# EAGLE board prototype_board (EAGLE 6.3)
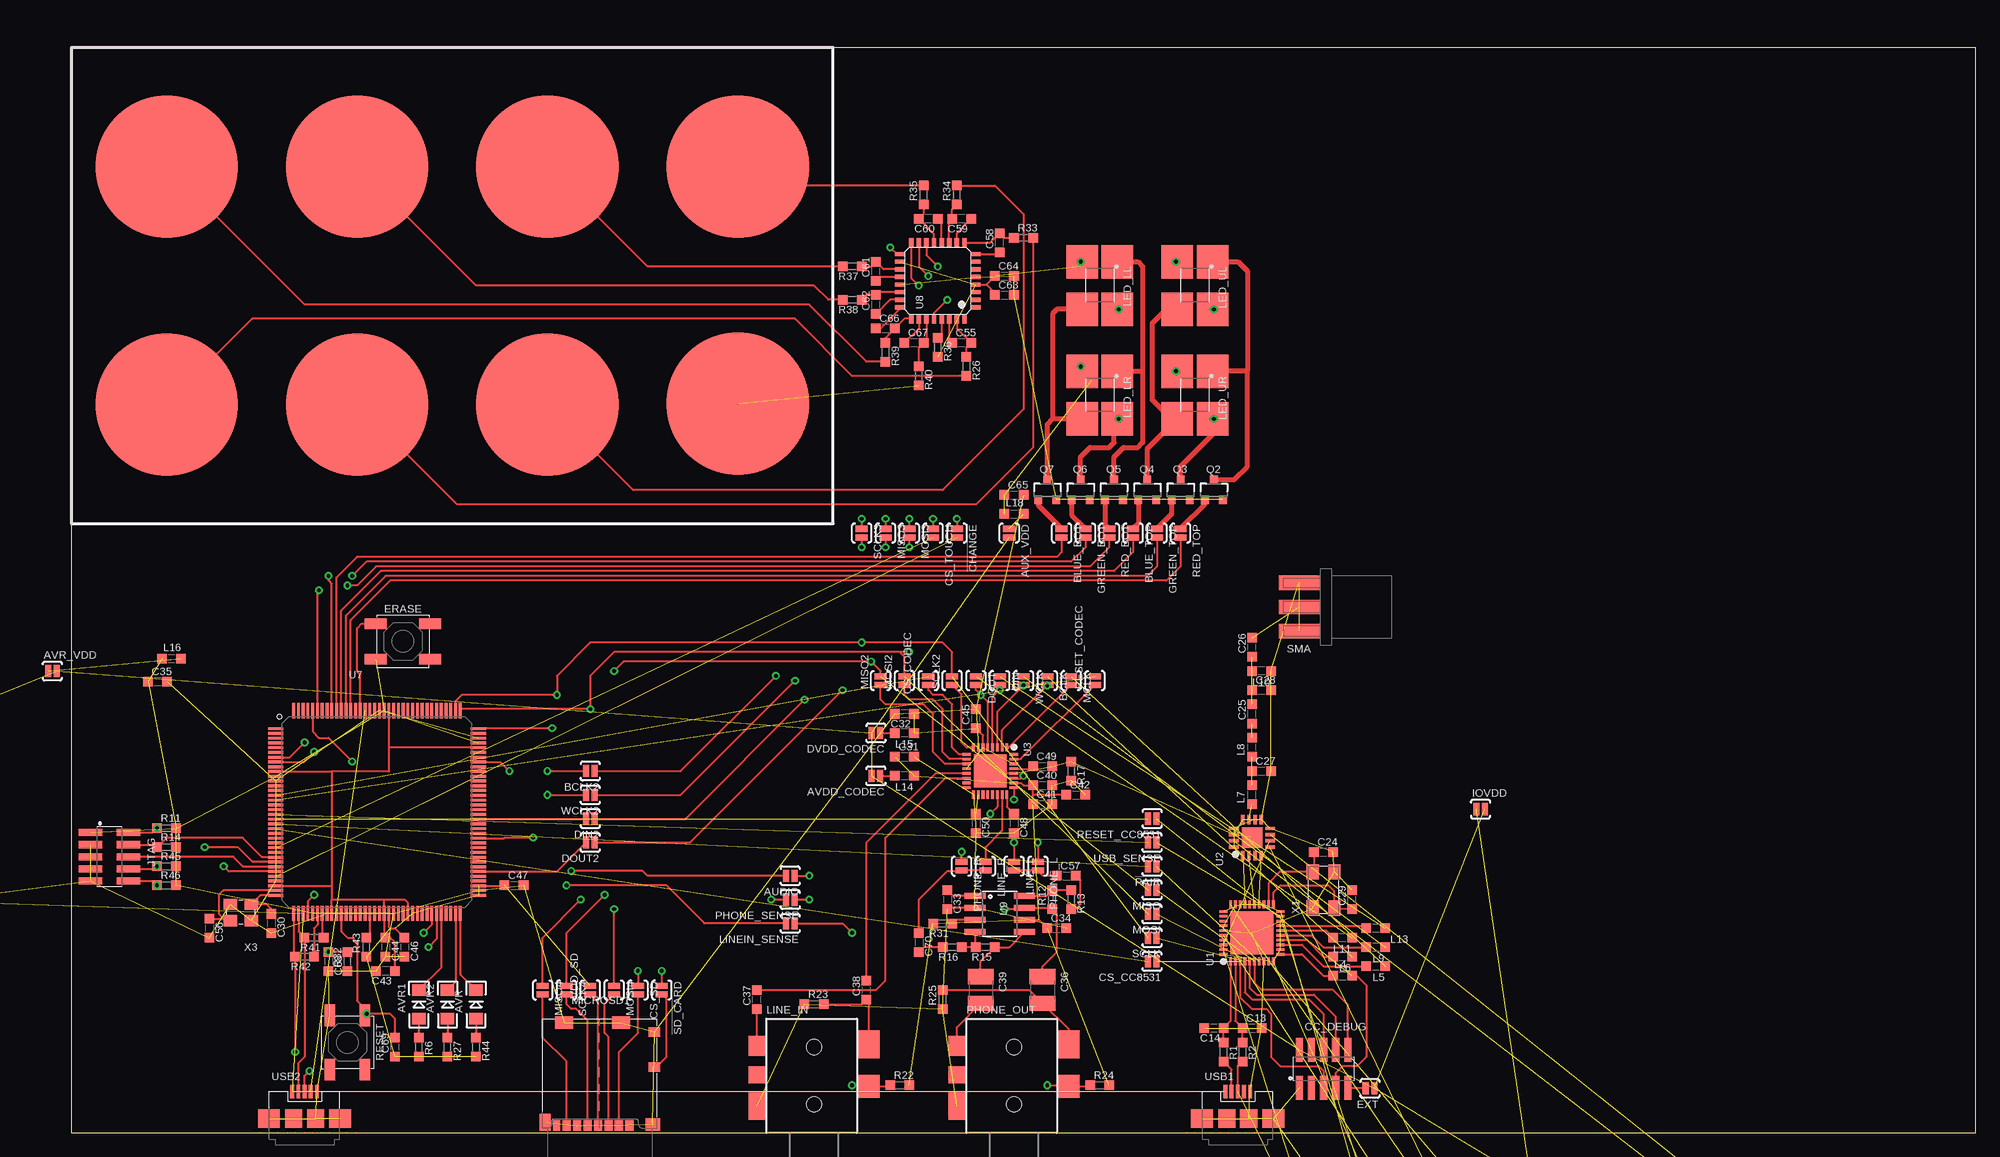
[diagram p0: board, top side]
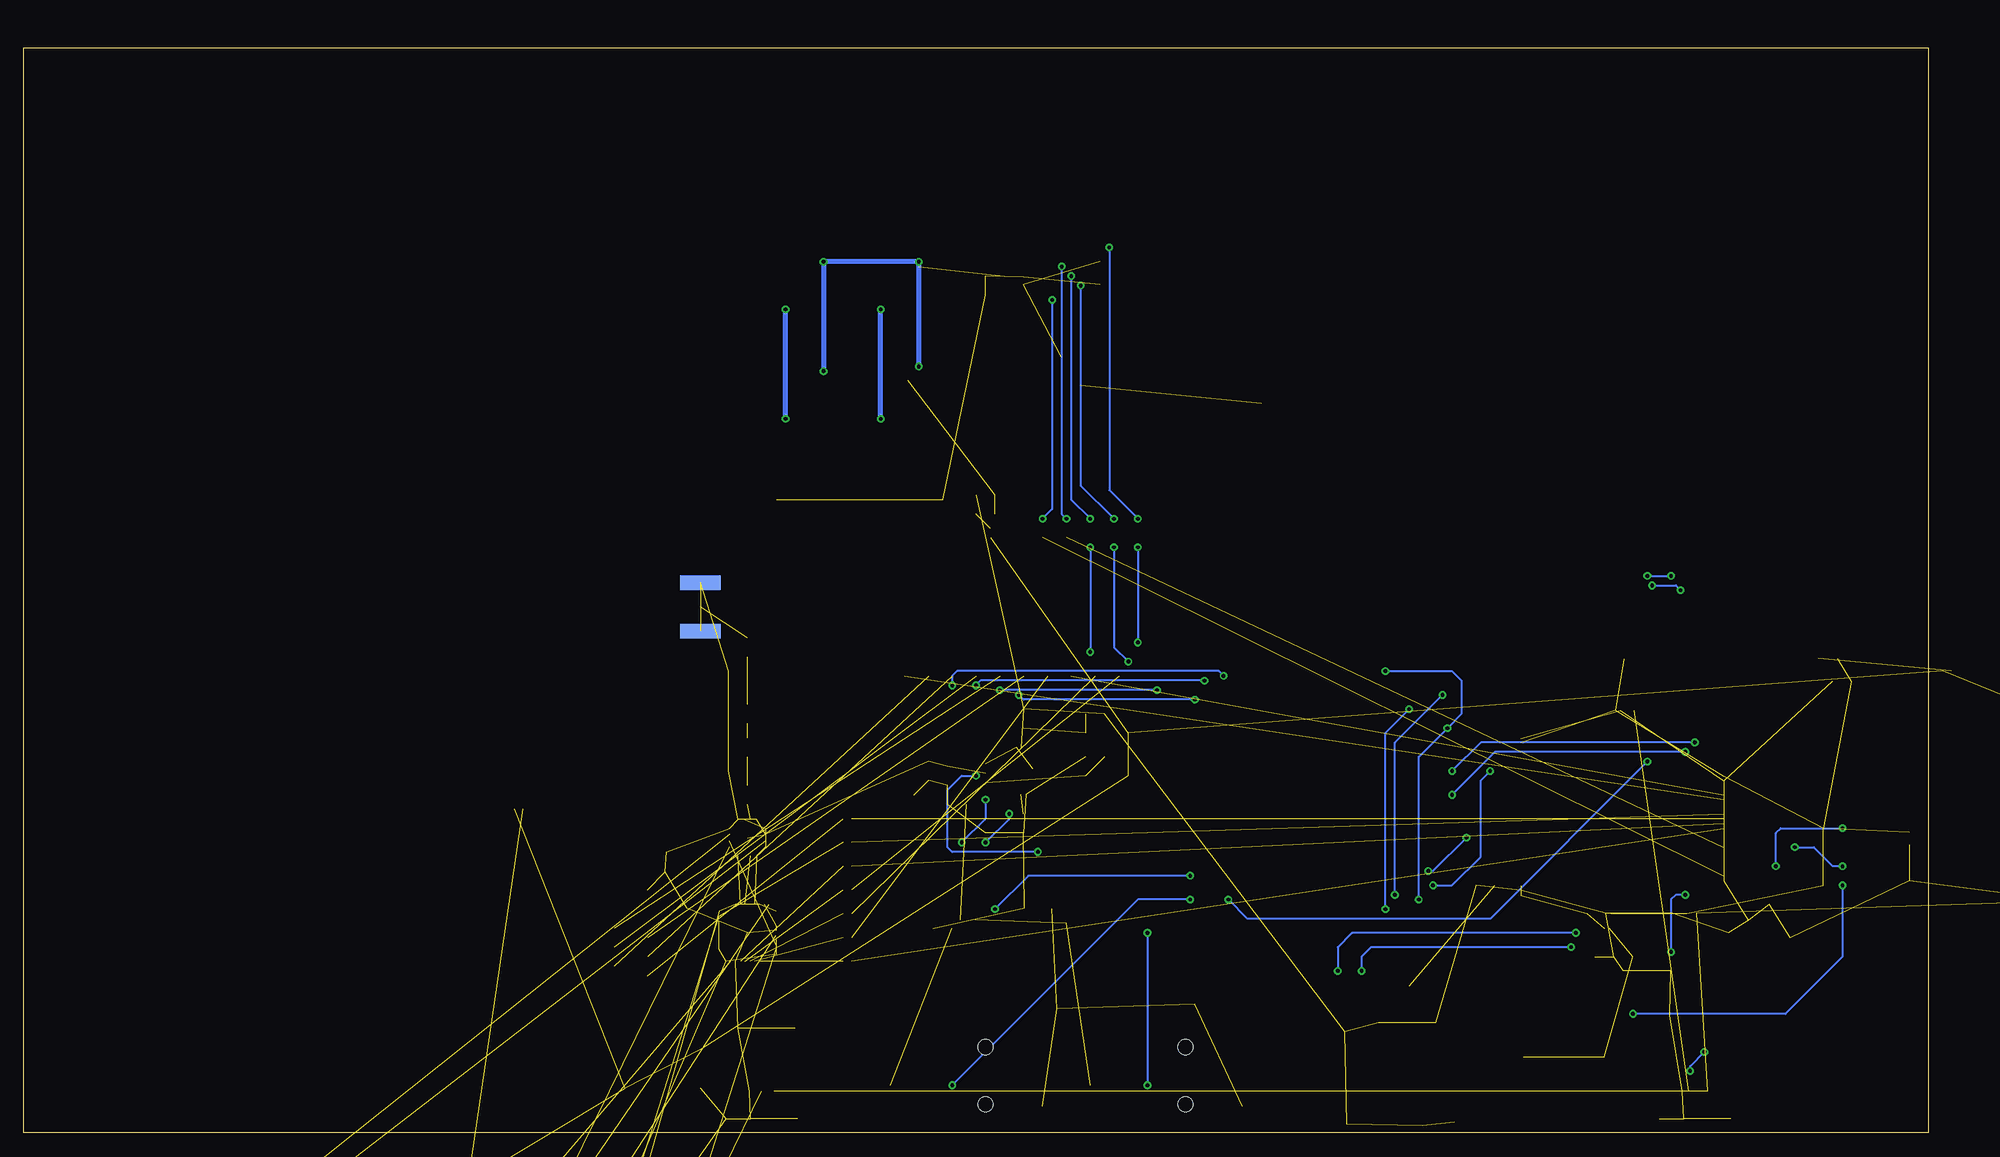
[diagram p1: board, bottom side, seen from below]

Size 200 x 114 mm. Coordinates in mm from the lower left corner, seen from the top.
Outline: 0,0 200,0 200,114 0,114 0,0
Copper layers (1*16): Top 0.035mm / dielectric 1.5mm / Bottom 0.035mm
Design rules "default": minimum track width 10mil, minimum drill 24mil, track to track 8mil, track to pad 8mil, pad to pad 8mil, via to via 8mil, smd to smd 8mil, copper to edge 40mil, drill to drill 8mil, minimum pad ring 10mil, minimum via ring 8mil, stop-mask expansion 4mil, vias tented up to drill 0mil, thermal gap 10mil

## Footprints (pad centres in the part's own frame; a part is rotated, then mirrored left to right if it is on the bottom)
SJ_2S-NO = smd 0.635 x 1.27: 1 -0.45,0; 2 0.45,0
LED-1206 = smd 1.2 x 1.4: A -1.5,0; C 1.5,0
1775469-2 = smd 1 x 3.5: + -1,-1.75; - 1,-1.75 | smd 1.5 x 3.4: X1 -3.25,3.8; X2 3.25,3.8
C0603 = smd 1 x 1: 1 -1,0; 2 1,0
C1210 = smd 1.6 x 2.7: 1 -1.4,0; 2 1.4,0
HEADER-10P-1.27MM = smd 0.75 x 2.5: 1 -2.54,-2; 2 -2.54,2; 3 -1.27,-2; 4 -1.27,2; 5 0,-2; 6 0,2; 7 1.27,-2; 8 1.27,2; 9 2.54,-2; 10 2.54,2
PTS-525 = smd 2.3 x 1.1: 1 -2.85,1.85; 2 2.85,1.85; 3 -2.85,-1.85; 4 2.85,-1.85
1210 = smd 1.6 x 2.7: 1 -1.4,0; 2 1.4,0
0603 = smd 1 x 1: 1 -1,0; 2 1,0
IFSC-1111AB-01 = smd 0.8 x 2.9: 1 -1.5,0; 2 1.5,0
PLCC-4 = smd 1.5 x 1.1: 1 -1.5,0.75; 2 -1.5,-0.75; 3 1.5,-0.75; 4 1.5,0.75 | smd 3.5 x 3.3: 1-2 -2.5,1.85; 2-2 -2.5,-1.85; 3-2 2.5,-1.85; 4-2 2.5,1.85
STX-35332-5N = smd 1.75 x 2.1: 1 -6,9.15 | smd 1.75 x 1.8: 2 -6,6.1 | smd 2.25 x 2.4: 3 5.75,4.9 | smd 2.25 x 2.9: 4 5.75,9.3 | smd 1.75 x 2.9: 5 -6,2.8 | hole 1.6: 0,9; 0,3
MOLEX_104031-0811 = smd 0.85 x 1.1: CD/DAT3 2.005,0.25; CLK -1.295,0.25; CMD 0.905,0.25; DAT0 -3.495,0.25; DAT2 3.105,0.25; VDD -0.195,0.25; VSS -2.395,0.25 | smd 0.75 x 1.1: DAT1 -4.545,0.25 | smd 1.55 x 1.35: GND1 5.565,0.375 | smd 1.17 x 1.8: GND2 -5.755,0.6 | smd 1.9 x 1.35: GND3 -3.73,11.075; GND4 2.24,11.075 | smd 1.2 x 1: SWA 5.74,6.4; SWB 5.74,10.1
SOT23-3 = smd 0.8 x 0.9: 1 -0.95,-1; 2 0.95,-1; 3 0,1.1
R0603 = smd 1 x 1: 1 -1,0; 2 1,0
CONREVSMA003.062 = smd 4.25 x 1.5 bottom: GND1 2.25,-2.54; GND3 2.25,2.54 | smd 4.25 x 1.5: GND2 2.25,-2.54; GND4 2.25,2.54; SIG 2.25,0
TOUCH-CIRCLE-15MM = smd 15 x 15: P$1 0,0
S-PVQFN-N40 = smd 0.85 x 0.28: 1 -3,2.25; 2 -3,1.75; 3 -3,1.25; 4 -3,0.75; 5 -3,0.25; 6 -3,-0.25; 7 -3,-0.75; 8 -3,-1.25; 9 -3,-1.75; 10 -3,-2.25; 21 3,-2.25; 22 3,-1.75; 23 3,-1.25; 24 3,-0.75; 25 3,-0.25; 26 3,0.25; 27 3,0.75; 28 3,1.25; 29 3,1.75; 30 3,2.25 | smd 0.28 x 0.85: 11 -2.25,-3; 12 -1.75,-3; 13 -1.25,-3; 14 -0.75,-3; 15 -0.25,-3; 16 0.25,-3; 17 0.75,-3; 18 1.25,-3; 19 1.75,-3; 20 2.25,-3; 31 2.25,3; 32 1.75,3; 33 1.25,3; 34 0.75,3; 35 0.25,3; 36 -0.25,3; 37 -0.75,3; 38 -1.25,3; 39 -1.75,3; 40 -2.25,3 | smd 4.5 x 4.5: GND 0,0
S-PVQFN-N16 = smd 1 x 0.35: 1 -1.9,0.975; 2 -1.9,0.325; 3 -1.9,-0.325; 4 -1.9,-0.975; 9 1.9,-0.975; 10 1.9,-0.325; 11 1.9,0.325; 12 1.9,0.975 | smd 0.35 x 1: 5 -0.975,-1.9; 6 -0.325,-1.9; 7 0.325,-1.9; 8 0.975,-1.9; 13 0.975,1.9; 14 0.325,1.9; 15 -0.325,1.9; 16 -0.975,1.9 | smd 2.16 x 2.16: GND 0,0
S-PVQFN-N32 = smd 0.85 x 0.28: 1 -2.475,1.75; 2 -2.475,1.25; 3 -2.475,0.75; 4 -2.475,0.25; 5 -2.475,-0.25; 6 -2.475,-0.75; 7 -2.475,-1.25; 8 -2.475,-1.75; 17 2.475,-1.75; 18 2.475,-1.25; 19 2.475,-0.75; 20 2.475,-0.25; 21 2.475,0.25; 22 2.475,0.75; 23 2.475,1.25; 24 2.475,1.75 | smd 0.28 x 0.85: 9 -1.75,-2.475; 10 -1.25,-2.475; 11 -0.75,-2.475; 12 -0.25,-2.475; 13 0.25,-2.475; 14 0.75,-2.475; 15 1.25,-2.475; 16 1.75,-2.475; 25 1.75,2.475; 26 1.25,2.475; 27 0.75,2.475; 28 0.25,2.475; 29 -0.25,2.475; 30 -0.75,2.475; 31 -1.25,2.475; 32 -1.75,2.475 | smd 3.45 x 3.45: GND 0,0
SOT-223 = smd 1.9 x 1.9: 1 -2.7,-3.1; 3 2.7,-3.1 | smd 1.1 x 1.9: 2 0,-3.1 | smd 6.7 x 1.9: 4 0,3.1
DFN-14 = smd 0.25 x 0.7: 1 -1.5,-1.45; 2 -1,-1.45; 3 -0.5,-1.45; 4 0,-1.45; 5 0.5,-1.45; 6 1,-1.45; 7 1.5,-1.45; 8 1.5,1.45; 9 1,1.45; 10 0.5,1.45; 11 0,1.45; 12 -0.5,1.45; 13 -1,1.45; 14 -1.5,1.45 | smd 3.3 x 1.7: GND 0,0
LQFP-144 = smd 1.6 x 0.3: 1 -10.65,8.75; 2 -10.65,8.25; 3 -10.65,7.75; 4 -10.65,7.25; 5 -10.65,6.75; 6 -10.65,6.25; 7 -10.65,5.75; 8 -10.65,5.25; 9 -10.65,4.75; 10 -10.65,4.25; 11 -10.65,3.75; 12 -10.65,3.25; 13 -10.65,2.75; 14 -10.65,2.25; 15 -10.65,1.75; 16 -10.65,1.25; 17 -10.65,0.75; 18 -10.65,0.25; 19 -10.65,-0.25; 20 -10.65,-0.75; 21 -10.65,-1.25; 22 -10.65,-1.75; 23 -10.65,-2.25; 24 -10.65,-2.75; 25 -10.65,-3.25; 26 -10.65,-3.75; 27 -10.65,-4.25; 28 -10.65,-4.75; 29 -10.65,-5.25; 30 -10.65,-5.75; 31 -10.65,-6.25; 32 -10.65,-6.75; 33 -10.65,-7.25; 34 -10.65,-7.75; 35 -10.65,-8.25; 36 -10.65,-8.75; 73 10.65,-8.75; 74 10.65,-8.25; 75 10.65,-7.75; 76 10.65,-7.25; 77 10.65,-6.75; 78 10.65,-6.25; 79 10.65,-5.75; 80 10.65,-5.25; 81 10.65,-4.75; 82 10.65,-4.25; 83 10.65,-3.75; 84 10.65,-3.25; 85 10.65,-2.75; 86 10.65,-2.25; 87 10.65,-1.75; 88 10.65,-1.25; 89 10.65,-0.75; 90 10.65,-0.25; 91 10.65,0.25; 92 10.65,0.75; 93 10.65,1.25; 94 10.65,1.75; 95 10.65,2.25; 96 10.65,2.75; 97 10.65,3.25; 98 10.65,3.75; 99 10.65,4.25; 100 10.65,4.75; 101 10.65,5.25; 102 10.65,5.75; 103 10.65,6.25; 104 10.65,6.75; 105 10.65,7.25; 106 10.65,7.75; 107 10.65,8.25; 108 10.65,8.75 | smd 0.3 x 1.6: 37 -8.75,-10.65; 38 -8.25,-10.65; 39 -7.75,-10.65; 40 -7.25,-10.65; 41 -6.75,-10.65; 42 -6.25,-10.65; 43 -5.75,-10.65; 44 -5.25,-10.65; 45 -4.75,-10.65; 46 -4.25,-10.65; 47 -3.75,-10.65; 48 -3.25,-10.65; 49 -2.75,-10.65; 50 -2.25,-10.65; 51 -1.75,-10.65; 52 -1.25,-10.65; 53 -0.75,-10.65; 54 -0.25,-10.65; 55 0.25,-10.65; 56 0.75,-10.65; 57 1.25,-10.65; 58 1.75,-10.65; 59 2.25,-10.65; 60 2.75,-10.65; 61 3.25,-10.65; 62 3.75,-10.65; 63 4.25,-10.65; 64 4.75,-10.65; 65 5.25,-10.65; 66 5.75,-10.65; 67 6.25,-10.65; 68 6.75,-10.65; 69 7.25,-10.65; 70 7.75,-10.65; 71 8.25,-10.65; 72 8.75,-10.65; 109 8.75,10.65; 110 8.25,10.65; 111 7.75,10.65; 112 7.25,10.65; 113 6.75,10.65; 114 6.25,10.65; 115 5.75,10.65; 116 5.25,10.65; 117 4.75,10.65; 118 4.25,10.65; 119 3.75,10.65; 120 3.25,10.65; 121 2.75,10.65; 122 2.25,10.65; 123 1.75,10.65; 124 1.25,10.65; 125 0.75,10.65; 126 0.25,10.65; 127 -0.25,10.65; 128 -0.75,10.65; 129 -1.25,10.65; 130 -1.75,10.65; 131 -2.25,10.65; 132 -2.75,10.65; 133 -3.25,10.65; 134 -3.75,10.65; 135 -4.25,10.65; 136 -4.75,10.65; 137 -5.25,10.65; 138 -5.75,10.65; 139 -6.25,10.65; 140 -6.75,10.65; 141 -7.25,10.65; 142 -7.75,10.65; 143 -8.25,10.65; 144 -8.75,10.65
S-PQFP-N32 = smd 0.45 x 1: 1 -2.8,-4; 2 -2,-4; 3 -1.2,-4; 4 -0.4,-4; 5 0.4,-4; 6 1.2,-4; 7 2,-4; 8 2.8,-4; 17 2.8,4; 18 2,4; 19 1.2,4; 20 0.4,4; 21 -0.4,4; 22 -1.2,4; 23 -2,4; 24 -2.8,4 | smd 1 x 0.45: 9 4,-2.8; 10 4,-2; 11 4,-1.2; 12 4,-0.4; 13 4,0.4; 14 4,1.2; 15 4,2; 16 4,2.8; 25 -4,2.8; 26 -4,2; 27 -4,1.2; 28 -4,0.4; 29 -4,-0.4; 30 -4,-1.2; 31 -4,-2; 32 -4,-2.8
SO08 = smd 0.61 x 2.21: 1 -1.905,-2.616; 2 -0.635,-2.616; 3 0.635,-2.616; 4 1.905,-2.616; 5 1.905,2.616; 6 0.635,2.616; 7 -0.635,2.616; 8 -1.905,2.616
USB_MICRO_AB = smd 0.4 x 1.4: 1 -1.3,2.85; 2 -0.65,2.85; 3 0,2.85; 4 0.65,2.85; 5 1.3,2.85 | smd 2.3 x 1.9: GND1 -3.75,0; GND4 3.75,0 | smd 1.8 x 1.9: GND2 -1.15,0; GND3 1.15,0
ABM3C = smd 1.6 x 1.3: 1 -1.9,-1.15; 2 1.9,-1.15; 3 1.9,1.15; 4 -1.9,1.15
ABM8G = smd 1.4 x 1.2: GND-1 -1.1,0.85; GND-2 1.1,-0.85; X1 1.1,0.85; X2 -1.1,-0.85

## Placement (x,y rotation side)
!CHANGE  [SJ_2S-NO]  93,63 270 top
!PAIR  [SJ_2S-NO]  113.5,28 180 top
!SD_CARD  [SJ_2S-NO]  62,15 270 top
AMP_VDD  [SJ_2S-NO]  180.26,-21.66 0 top  (outside the outline)
AUDIO  [SJ_2S-NO]  75.5,27 180 top
AUX_VDD  [SJ_2S-NO]  98.5,63 270 top
AVDD  [SJ_2S-NO]  176.78,-28.16 0 top  (outside the outline)
AVDD_CODEC  [SJ_2S-NO]  84.5,37.5 180 top
AVR  [LED-1206]  42.5,13.5 90 top
AVR1  [LED-1206]  36.5,13.5 90 top
AVR2  [LED-1206]  39.5,13.5 90 top
AVR_VDD  [SJ_2S-NO]  -2,48.5 0 top
BATTERY  BATTERY-LIPO-JST  [1775469-2]  -99.14,15.49 0 top  (outside the outline)
BCLK  [SJ_2S-NO]  102.5,47.5 270 top
BCLK2  [SJ_2S-NO]  54.5,38 180 top
BLUE_BOT  [SJ_2S-NO]  104,63 270 top
BLUE_TOP  [SJ_2S-NO]  111.5,63 270 top
C1  2.2u  [C0603]  155.5,-37 0 top  (outside the outline)
C2  2.2u  [C0603]  149.5,-33 0 top  (outside the outline)
C3  1u  [C0603]  143.5,-42.5 0 top  (outside the outline)
C4  100n  [C0603]  146.5,-40 0 top  (outside the outline)
C5  100n  [C0603]  147.5,-37.5 0 top  (outside the outline)
C6  100n  [C0603]  150,-35 0 top  (outside the outline)
C7  100n  [C0603]  150,-42.5 0 top  (outside the outline)
C8  100n  [C0603]  170,-45 0 top  (outside the outline)
C9  100n  [C0603]  170.5,-47.5 0 top  (outside the outline)
C10  220p  [C0603]  172,-42.5 0 top  (outside the outline)
C11  100n  [C0603]  166,-48 0 top  (outside the outline)
C12  100n  [C0603]  173,-50 0 top  (outside the outline)
C13  47p  [C0603]  124,11 0 top
C14  47p  [C0603]  120,11 180 top
C15  2.2u  [C0603]  202.5,-17.5 0 top  (outside the outline)
C16  10p  [C0603]  214.5,-22.5 0 top  (outside the outline)
C17  1n  [C0603]  210.5,-25.5 0 top  (outside the outline)
C18  10p  [C0603]  208,-31 0 top  (outside the outline)
C19  1n  [C0603]  205,-27.5 0 top  (outside the outline)
C20  1n  [C0603]  216.5,-31 0 top  (outside the outline)
C21  18p  [C0603]  216,-27 0 top  (outside the outline)
C22  1n  [C0603]  219,-33.5 0 top  (outside the outline)
C23  1u  [C0603]  145,-53.5 0 top  (outside the outline)
C24  15p  [C0603]  131.5,29.5 0 top
C25  6.8p_HF  [C0603]  124,44 90 top
C26  100p_HF  [C0603]  124,51 90 top
C27  1.2p_HF  [C0603]  125,38 0 top
C28  1.8p_HF  [C0603]  125,46.5 0 top
C29  15p  [C0603]  134.5,24.5 90 top
C30  10p  [C0603]  21,22 270 top
C31  2.2u  [C0603]  87.5,39.5 0 top
C32  2.2u  [C0603]  87.5,44 180 top
C33  1u  [C0603]  92,24.5 270 top
C34  100n  [C0603]  103.5,21.5 0 top
C35  2.2u  [C0603]  9.06,47.4 0 top
C36  220u  [C1210]  102,15 270 top
C37  0.47u  [C0603]  72,14 90 top
C38  0.47u  [C0603]  83.5,15 90 top
C39  220u  [C1210]  95.5,15 270 top
C40  100n  [C0603]  102,36.5 0 top
C41  1u  [C0603]  102,34.5 0 top
C42  10u  [C0603]  105.5,35.5 0 top
C43  100n  [C0603]  33,17 180 top
C44  4.7u  [C0603]  33,19.5 270 top
C45  1u  [C0603]  95,43.5 90 top
C46  10u  [C0603]  35,19.5 270 top
C47  100n  [C0603]  46.5,26 0 top
C48  10u  [C0603]  99,32.5 270 top
C49  10u  [C0603]  102,38.5 0 top
C50  10u  [C0603]  95,32.5 270 top
C51  10u  [C0603]  -91.5,33.5 0 top  (outside the outline)
C52  10u  [C0603]  -77,19 0 top  (outside the outline)
C53  10u  [C0603]  -75,16.5 0 top  (outside the outline)
C54  100n  [C0603]  -79.5,35.5 0 top  (outside the outline)
C55  10n  [C0603]  93.5,83 0 top
C56  10p  [C0603]  14.5,21.5 270 top
C57  0.47u  [C0603]  104.5,27 0 top
C58  10n  [C0603]  97.5,93.5 90 top
C59  10n  [C0603]  93.5,96 180 top
C60  10n  [C0603]  90,96 180 top
C61  10n  [C0603]  84.5,90.5 90 top
C62  10n  [C0603]  84.5,87 90 top
C63  100n  [C0603]  98,88 0 top
C64  100n  [C0603]  98,90 0 top
C65  2.2u  [C0603]  99,67 0 top
C66  10n  [C0603]  85.5,84.5 0 top
C67  10n  [C0603]  88.5,83 0 top
C68  10p  [C0603]  27,18 270 top
C69  100n  [C0603]  34,9 90 top
C70  0.47u  [C0603]  89,20 270 top
CC8531  [LED-1206]  182,-37.5 0 top  (outside the outline)
CC_DEBUG  HEADER-10P-SMD-MALE2  [HEADER-10P-1.27MM]  131.52,6.73 0 top
CHARGE  [LED-1206]  -100.5,31 0 top  (outside the outline)
CS_CC8531  [SJ_2S-NO]  113.5,18 180 top
CS_CODEC  [SJ_2S-NO]  90,47.5 90 top
CS_SD  [SJ_2S-NO]  59.5,15 270 top
CS_TOUCH  [SJ_2S-NO]  90.5,63 270 top
DIN  [SJ_2S-NO]  97.5,47.5 270 top
DIN2  [SJ_2S-NO]  54.5,33 180 top
DOUT  [SJ_2S-NO]  95,47.5 270 top
DOUT2  [SJ_2S-NO]  54.5,30.5 180 top
DVDD_CODEC  [SJ_2S-NO]  84.5,42 180 top
ERASE  TACT_SWITCH-PTS-525  [PTS-525]  34.83,51.62 0 top
EXT  [SJ_2S-NO]  136.38,4.66 180 top
F1  2A  [1210]  -80.24,28.73 0 top  (outside the outline)
GREEN_BOT  [SJ_2S-NO]  106.5,63 270 top
GREEN_TOP  [SJ_2S-NO]  114,63 270 top
IOVDD  [SJ_2S-NO]  148,34 0 top
JTAG  HEADER-10P-SMD-MALE2  [HEADER-10P-1.27MM]  4,29 270 top
L1  BEAD  [0603]  156.5,-33.5 0 top  (outside the outline)
L2  BEAD  [0603]  144,-33.5 0 top  (outside the outline)
L3  BEAD  [0603]  196.5,-19 0 top  (outside the outline)
L4  6.8n  [0603]  133.5,16.5 0 top
L5  6.8n  [0603]  137,17.5 180 top
L6  6.8n  [0603]  133.5,18.5 180 top
L7  2.2n_HF  [0603]  124,35.5 90 top
L8  3.9n_HF  [0603]  124,40.5 90 top
L9  6.8n  [0603]  137,19.5 180 top
L10  1.5n_HF  [0603]  125,48.5 180 top
L11  6.8n  [0603]  133.5,20.5 180 top
L12  6.8n  [0603]  178,-65.5 0 top  (outside the outline)
L13  6.8n  [0603]  137,21.5 180 top
L14  BEAD  [0603]  87.5,37.5 180 top
L15  BEAD  [0603]  87.5,42 180 top
L16  BEAD  [0603]  10.52,49.8 0 top
L17  3.3u  [IFSC-1111AB-01]  -75.5,25 0 top  (outside the outline)
L18  BEAD  [0603]  99,65 0 top
LED_LL  LED_RGB  [PLCC-4]  108,89 270 top
LED_LR  LED_RGB  [PLCC-4]  108,77.5 270 top
LED_UL  LED_RGB  [PLCC-4]  118,89 270 top
LED_UR  LED_RGB  [PLCC-4]  118,77.5 270 top
LINE_IN  PHONE_SW-STX-35332-5N  [STX-35332-5N]  78,0 0 top
LINE_L  [SJ_2S-NO]  99,28 270 top
LINE_R  [SJ_2S-NO]  96,28 270 top
LINEIN_SENSE  [SJ_2S-NO]  75.5,22 180 top
MCLK  [SJ_2S-NO]  105,47.5 270 top
MICROSD1  MICROSD104031-0811  [MOLEX_104031-0811]  55.5,0.5 0 top
MISO  [SJ_2S-NO]  113.5,25.5 180 top
MISO2  [SJ_2S-NO]  85,47.5 90 top
MISO3  [SJ_2S-NO]  85.5,63 270 top
MISO4  [SJ_2S-NO]  49.5,15 270 top
MOSI  [SJ_2S-NO]  113.5,23 180 top
MOSI2  [SJ_2S-NO]  87.5,47.5 90 top
MOSI3  [SJ_2S-NO]  88,63 270 top
MOSI4  [SJ_2S-NO]  57,15 270 top
PHONE_L  [SJ_2S-NO]  101.5,28 270 top
PHONE_OUT  PHONE_SW-STX-35332-5N  [STX-35332-5N]  99,0 0 top
PHONE_R  [SJ_2S-NO]  93.5,28 270 top
PHONE_SENSE  [SJ_2S-NO]  75.5,24.5 180 top
POWER  [LED-1206]  -68.5,17.5 0 top  (outside the outline)
Q1  Si2333  [SOT23-3]  -70.5,29.5 0 top  (outside the outline)
Q2  2N7002  [SOT23-3]  120,67.5 0 top
Q3  2N7002  [SOT23-3]  116.5,67.5 0 top
Q4  2N7002  [SOT23-3]  113,67.5 0 top
Q5  2N7002  [SOT23-3]  109.5,67.5 0 top
Q6  2N7002  [SOT23-3]  106,67.5 0 top
Q7  2N7002  [SOT23-3]  102.5,67.5 0 top
R1  33  [R0603]  121,8.5 270 top
R2  33  [R0603]  123,8.5 270 top
R3  100  [R0603]  -70,21 0 top  (outside the outline)
R4  56k  [R0603]  162.5,-37 0 top  (outside the outline)
R5  100  [R0603]  183.5,-48.5 0 top  (outside the outline)
R6  100  [R0603]  36.5,9 270 top
R7  1.5K  [R0603]  156,-66.5 0 top  (outside the outline)
R8  4.3K  [R0603]  203,-32.5 0 top  (outside the outline)
R9  4.3K  [R0603]  209,-34 0 top  (outside the outline)
R10  10K  [R0603]  172.5,-67 0 top  (outside the outline)
R11  100K  [R0603]  10,32 0 top
R12  20K  [R0603]  103,24.5 90 top
R13  20K  [R0603]  105,24.5 270 top
R14  100K  [R0603]  10,30 0 top
R15  20K  [R0603]  96,19.5 180 top
R16  20K  [R0603]  92.5,19.5 180 top
R17  0  [R0603]  105,38 270 top
R18  330  [R0603]  -103,26.5 0 top  (outside the outline)
R19  8.2  [R0603]  -83,36.5 0 top  (outside the outline)
R20  2.94K  [R0603]  -72,38 0 top  (outside the outline)
R21  1K  [R0603]  -73,35 0 top  (outside the outline)
R22  1M  [R0603]  87,5 0 top
R23  100K  [R0603]  78,13.5 0 top
R24  1M  [R0603]  108,5 0 top
R25  100K  [R0603]  91.5,14 90 top
R26  4.7K  [R0603]  94,80.5 270 top
R27  100  [R0603]  39.5,9 270 top
R31  10K  [R0603]  91.5,22 180 top
R32  6.8K  [R0603]  29,18 90 top
R33  4.7K  [R0603]  100,94 0 top
R34  4.7K  [R0603]  93,98.5 90 top
R35  4.7K  [R0603]  89.5,98.5 90 top
R36  100K  [R0603]  91,82.5 270 top
R37  4.7K  [R0603]  82,91 180 top
R38  4.7K  [R0603]  82,87.5 180 top
R39  4.7K  [R0603]  85.5,82 270 top
R40  4.7K  [R0603]  89,79.5 270 top
R41  39  [R0603]  25.5,20.5 180 top
R42  39  [R0603]  24.5,18.5 180 top
R43  100K  [R0603]  31,19.5 90 top
R44  100  [R0603]  42.5,9 270 top
R45  100K  [R0603]  10,28 0 top
R46  100K  [R0603]  10,26 0 top
RED_BOT  [SJ_2S-NO]  109,63 270 top
RED_TOP  [SJ_2S-NO]  116.5,63 270 top
RESET  TACT_SWITCH-PTS-525  [PTS-525]  29,9.5 270 top
RESET_CC8531  [SJ_2S-NO]  113.5,33 180 top
RESET_CODEC  [SJ_2S-NO]  107.5,47.5 90 top
SCLK  [SJ_2S-NO]  113.5,20.5 180 top
SCLK2  [SJ_2S-NO]  92.5,47.5 90 top
SCLK3  [SJ_2S-NO]  83,63 270 top
SCLK4  [SJ_2S-NO]  52,15 270 top
SMA  SMA-REVSMA-0.62  [CONREVSMA003.062]  131.2,55.24 180 top
SW1  TOUCH_PAD-CIRCLE-15MM  [TOUCH-CIRCLE-15MM]  10,76.5 0 top
SW4  TOUCH_PAD-CIRCLE-15MM  [TOUCH-CIRCLE-15MM]  30,76.5 0 top
SW5  TOUCH_PAD-CIRCLE-15MM  [TOUCH-CIRCLE-15MM]  50,76.5 0 top
SW6  TOUCH_PAD-CIRCLE-15MM  [TOUCH-CIRCLE-15MM]  70,101.5 0 top
SW7  TOUCH_PAD-CIRCLE-15MM  [TOUCH-CIRCLE-15MM]  50,101.5 0 top
SW8  TOUCH_PAD-CIRCLE-15MM  [TOUCH-CIRCLE-15MM]  30,101.5 0 top
SW9  TOUCH_PAD-CIRCLE-15MM  [TOUCH-CIRCLE-15MM]  10,101.5 0 top
SW10  TOUCH_PAD-CIRCLE-15MM  [TOUCH-CIRCLE-15MM]  70,76.6 0 top
U1  CC8531  [S-PVQFN-N40]  124,21 90 top
U2  CC2591  [S-PVQFN-N16]  124,31 90 top
U3  TLV320AIC3204  [S-PVQFN-N32]  96.5,38 270 top
U5  [SOT-223]  -89.72,17 0 top  (outside the outline)
U6  LTC4088-2  [DFN-14]  -90.73,25.46 0 top  (outside the outline)
U7  ATSAM3X8E_ALT-LQFP-144  [LQFP-144]  32.1,33.7 0 top
U8  AT42QT1110-TQFP  [S-PQFP-N32]  91,89.5 90 top
U9  LM4881  [SO08]  97.5,23 270 top
USB1  USB_MICRO_AB  [USB_MICRO_AB]  122.5,1.5 0 top
USB2  USB_MICRO_AB  [USB_MICRO_AB]  24.5,1.5 0 top
USB_SENSE  [SJ_2S-NO]  113.5,30.5 180 top
VDD_SD  [SJ_2S-NO]  54.5,15 90 top
WCLK  [SJ_2S-NO]  100,47.5 270 top
WCLK2  [SJ_2S-NO]  54.5,35.5 180 top
X1  48MHz  [ABM3C]  131.5,25.5 90 top
X3  12MHz  [ABM8G]  17.8,23.15 180 top

## Library data of the parts
!CHANGE !PAIR !SD_CARD AMP_VDD AUDIO AUX_VDD AVDD AVDD_CODEC AVR_VDD BCLK BCLK2 BLUE_BOT BLUE_TOP CS_CC8531 CS_CODEC CS_SD CS_TOUCH DIN DIN2 DOUT DOUT2 DVDD_CODEC EXT GREEN_BOT GREEN_TOP IOVDD LINE_L LINE_R LINEIN_SENSE MCLK MISO MISO2-MISO4 MOSI MOSI2-MOSI4 PHONE_L PHONE_R PHONE_SENSE RED_BOT RED_TOP RESET_CC8531 RESET_CODEC SCLK SCLK2-SCLK4 USB_SENSE VDD_SD WCLK WCLK2 = SparkFun-Passives (1)
AVR AVR1 AVR2 CC8531 CHARGE POWER = SparkFun-LED
BATTERY C30 C36 C39 C51 C54 C56 C68 C69 CC_DEBUG ERASE F1 JTAG L17 LED_LL LED_LR LED_UL LED_UR LINE_IN MICROSD1 PHONE_OUT R12 R13 R15 R16 R18-R21 RESET SMA SW1 SW4-SW10 U1-U3 U5-U9 USB1 USB2 X1 X3 = 00-EvaLibrary
C1-C29 C31-C35 C37 C38 C40-C50 C52 C53 C55 C57-C67 C70 R1-R11 R14 R17 R22-R27 R31-R46 = rcl
L1-L16 L18 = SparkFun-Passives
Q1-Q7 = SparkFun-DiscreteSemi

## Nets
3.3V [Power]: AMP_VDD.2 AUX_VDD.2 AVDD.2 AVDD_CODEC.2 AVR_VDD.2 C53.1 CC_DEBUG.2 DVDD_CODEC.2 EXT.1 IOVDD.2 R3.2 U5.3
!AVR_LED: AVR.C U7.72
!AVR_LED2: AVR1.C U7.68
!AVR_LED3: AVR2.C U7.71
!CHANGE: !CHANGE.2 U7.32
!PAIR: !PAIR.2 U7.21
!RESET: C69.2 JTAG.10 R46.1 RESET.1 U7.47
!SD_CARD: !SD_CARD.1 U7.66
AGND [Analog]: C31.2 C33.2 C34.2 C40.2 C41.2 C42.2 C48.2 C50.2 LINE_IN.5 PHONE_OUT.5 R17.2 R23.1 R25.1 U3.17 U9.2
AUDIO: AUDIO.2 U7.85
AUX_!CHANGE: !CHANGE.1 U8.28
AUX_BLUE_BOT: BLUE_BOT.1 Q7.1
AUX_BLUE_TOP: BLUE_TOP.1 Q4.1
AUX_CS: CS_TOUCH.1 U8.14
AUX_GREEN_BOT: GREEN_BOT.1 Q6.1
AUX_GREEN_TOP: GREEN_TOP.1 Q3.1
AUX_MISO: MISO3.1 U8.16
AUX_MOSI: MOSI3.1 U8.15
AUX_RED_BOT: Q5.1 RED_BOT.1
AUX_RED_TOP: Q2.1 RED_TOP.1
AUX_SCLK: SCLK3.1 U8.17
AUX_VDD: C63.1 C64.1 C65.1 L18.1 LED_LL.2 LED_LL.2-2 LED_LR.2 LED_LR.2-2 LED_UL.2 LED_UL.2-2 LED_UR.2 LED_UR.2-2 R36.2 U8.4 U8.18
AUX_VSS: C63.2 C64.2 Q2.2 Q3.2 Q4.2 Q5.2 Q6.2 Q7.2 U8.5 U8.21
AVDD: C2.1 C8.1 C9.1 C10.1 C11.1 C12.1 C15.1 C16.1 C17.1 C18.1 C19.1 C20.1 C21.1 C22.1 L2.1 L3.1 R9.2 U1.20 U1.23 U1.26 U1.27 U1.28 U1.31 U2.1 U2.10 U2.13 U2.16
AVDD_CODEC: C31.1 C34.1 C40.1 C41.1 C42.1 L14.1 R22.2 R24.2 R31.2 U3.26 U9.6
AVR_VDD: C35.1 C46.1 C47.1 C69.1 ERASE.3 JTAG.1 L16.1 R6.2 R11.2 R14.2 R27.2 R43.1 R44.2 R45.2 R46.2 U7.11 U7.41 U7.52 U7.57 U7.62 U7.73 U7.75 U7.105 U7.125 VDD_SD.2
BAT [Power]: BATTERY.+ Q1.2 U6.9
BCLK: BCLK2.1 BCLK.2 U3.2
BLUE_BOT: BLUE_BOT.2 U7.135
BLUE_TOP: BLUE_TOP.2 U7.134
C_AUDIO: AUDIO.1 C36.1 R12.1 U9.7
C_CS_CODEC: CS_CODEC.1 U3.9
C_LINEIN_SENSE: LINE_IN.3 LINEIN_SENSE.1 R22.1
C_MISO: MISO2.1 U3.11
C_MOSI: MOSI2.1 U3.10
C_PHONE_SENSE: PHONE_OUT.3 PHONE_SENSE.1 R24.1
C_RESET_CODEC: RESET_CODEC.1 U3.31
C_SCLK: SCLK2.1 U3.8
CS_CC8531: CS_CC8531.2 U7.22
CS_CODEC: CS_CODEC.2 U7.15
CS_SD: CS_SD.1 U7.67
CS_TOUCH: CS_TOUCH.2 U7.26
D+_CC8531: R2.2 R7.2 USB1.3
D+_UC: R42.2 U7.37 USB2.3
D-_CC8531: R1.2 USB1.2
D-_UC: R41.2 U7.38 USB2.2
DIN: DIN.2 DOUT2.1 U3.4
DOUT: DIN2.1 DOUT.2 U3.5
DVDD: C49.1 U3.29
DVDD_CODEC: C32.1 C45.1 L15.1 U3.6 U3.12 U3.30
ERASE: ERASE.1 U7.130
GND [Power]: BATTERY.- BATTERY.X1 BATTERY.X2 C1.2 C2.2 C3.2 C4.2 C5.2 C6.2 C7.2 C8.2 C9.2 C10.2 C11.2 C12.2 C13.2 C14.2 C15.2 C16.2 C17.2 C18.2 C19.2 C20.2 C21.2 C22.2 C23.2 C24.2 C27.2 C28.2 C29.2 C30.2 C32.2 C35.2 C43.2 C44.2 C45.2 C46.2 C47.2 C49.2 C51.2 C52.2 C53.2 C54.2 C56.2 C65.2 C68.2 CC_DEBUG.1 JTAG.3 JTAG.5 JTAG.9 L10.1 MICROSD1.GND1 MICROSD1.GND2 MICROSD1.GND3 MICROSD1.GND4 MICROSD1.SWB MICROSD1.VSS POWER.C R4.1 R8.1 R10.1 R17.1 R20.1 R21.1 R32.1 RESET.3 SMA.GND1 SMA.GND2 SMA.GND3 SMA.GND4 U1.8 U1.29 U1.34 U1.35 U1.GND U2.8 U2.9 U2.12 U2.14 U2.GND U3.7 U3.28 U3.GND U5.2 U5.4 U6.1 U6.4 U6.14 U6.GND U7.12 U7.33 U7.44 U7.46 U7.54 U7.58 U7.74 U7.106 U7.126 USB1.5 USB1.GND1 USB1.GND2 USB1.GND3 USB1.GND4 USB2.5 USB2.GND1 USB2.GND2 USB2.GND3 USB2.GND4 X1.2 X1.4 X3.GND-1 X3.GND-2
GREEN_BOT: GREEN_BOT.2 U7.136
GREEN_TOP: GREEN_TOP.2 U7.133
IN_L: C38.1 LINE_IN.4 R23.2
IN_R: C37.1 LINE_IN.1
IOVDD: C1.1 C3.1 C4.1 C5.1 C6.1 C7.1 CC8531.A L1.1 U1.10 U1.12 U1.18 U1.37 U1.40
IOVDD1: C14.1 R1.1 U1.1
IOVDD2: C13.1 R2.1 U1.2
LINE_L: LINE_L.1 U3.22
LINE_R: LINE_R.1 U3.23
LINEIN_SENSE: LINEIN_SENSE.2 U7.101
LNA_EN: U1.38 U2.6
M_BCLK: BCLK2.2 U7.7
M_DIN/S_DOUT: DIN2.2 U7.89
M_DOUT/S_DIN: DOUT2.2 U7.78
M_WCLK: U7.8 WCLK2.2
MCLK: MCLK.2 U3.1
MISO: MISO2.2 MISO3.2 MISO4.1 MISO.2 U7.108
MOSI: MOSI2.2 MOSI3.2 MOSI4.1 MOSI.2 U7.109
N$1: C29.1 U1.21 X1.1
N$2: C24.1 U1.22 X1.3
N$3: L4.1 U1.11
N$4: L11.2 U1.16
N$5: L6.2 U1.14
N$6: C56.1 U7.35 X3.X1
N$7: R8.2 U2.15
N$8: R9.1 U2.7
N$9: C26.2 SMA.SIG
N$10: C55.2 R26.1 U8.31
N$11: C55.1 U8.30
N$12: AVR.A R44.1
N$13: L7.1 U2.11
N$14: C27.1 L7.2 L8.1
N$15: C25.1 L8.2
N$16: C25.2 C26.1 C28.1 L10.2
N$17: C48.1 U3.24
N$18: L12.1 U1.36
N$19: R4.2 U1.30
N$20: AVDD.1 L2.2
N$21: C23.1 U1.39
N$22: F1.2 U5.1
N$23: L5.2 U1.13
N$24: IOVDD.1 L1.2
N$25: L9.2 U1.15
N$26: C33.1 U9.1
N$27: L13.2 U1.17
N$28: R5.1 U1.9
N$29: CC8531.C R5.2
N$30: C58.2 R33.1 U8.9
N$31: POWER.A R3.1
N$32: CHARGE.C U6.7
N$33: CHARGE.A R18.1
N$34 [Analog]: C37.2 U3.14
N$35 [Analog]: C38.2 U3.13
N$36: L17.1 U6.12
N$37: R21.2 U6.5 U6.6
N$38: R19.2 R20.2 U6.2
N$39: AVDD_CODEC.1 L14.2
N$40: C39.1 R15.1 U9.5
N$41: C59.2 R34.1 U8.11
N$42: C60.2 R35.1 U8.13
N$43: C57.1 LINE_L.2 PHONE_L.2
N$44: R26.2 SW1.P$1
N$45: C70.1 LINE_R.2 PHONE_R.2
N$46: DVDD_CODEC.1 L15.2
N$47: AUX_VDD.1 L18.2
N$48: C54.1 R19.1
N$49 [Power]: C52.1 F1.1 L17.2 Q1.3 U6.3 U6.10
N$50: CC_DEBUG.9 EXT.2
N$51: Q1.1 U6.8
N$52: AMP_VDD.1 L3.2
N$53: R12.2 R13.1 U9.8
N$54: R15.2 R16.1 U9.4
N$55: R31.1 U9.3
N$56: LED_UL.1 LED_UL.1-2 LED_UR.1 LED_UR.1-2 Q2.3
N$57: CS_SD.2 MICROSD1.CD/DAT3
N$58: LED_UL.4 LED_UL.4-2 LED_UR.4 LED_UR.4-2 Q3.3
N$59: C30.1 U7.36 X3.X2
N$60: C58.1 U8.8
N$61: R33.2 SW4.P$1
N$62: C59.1 U8.10
N$63: R34.2 SW5.P$1
N$64: C60.1 U8.12
N$65: R35.2 SW6.P$1
N$66: C66.2 R39.1 U8.25
N$67: MICROSD1.CLK SCLK4.2
N$68: C67.2 R40.1 U8.27
N$69: C66.1 U8.24
N$70: R39.2 SW9.P$1
N$71: C61.2 R37.1 U8.19
N$72: R37.2 SW7.P$1
N$73: C62.2 R38.1 U8.22
N$74: R38.2 SW8.P$1
N$75: C62.1 U8.23
N$76: C61.1 U8.20
N$77: R36.1 U8.29
N$78: LED_UL.3 LED_UL.3-2 LED_UR.3 LED_UR.3-2 Q4.3
N$79: LED_LL.1 LED_LL.1-2 LED_LR.1 LED_LR.1-2 Q5.3
N$80: LED_LL.4 LED_LL.4-2 LED_LR.4 LED_LR.4-2 Q6.3
N$81: C67.1 U8.26
N$82: R40.2 SW10.P$1
N$83: LED_LL.3 LED_LL.3-2 LED_LR.3 LED_LR.3-2 Q7.3
N$84: MICROSD1.CMD MOSI4.2
N$85: R41.1 U7.43
N$86: R42.1 U7.42
N$87: C68.1 R32.2 U7.40
N$88: MICROSD1.DAT0 MISO4.2
N$89: !SD_CARD.2 MICROSD1.SWA
N$90: R43.2 U7.53
N$91: MICROSD1.VDD VDD_SD.1
N$92 [Power]: AVR_VDD.1 L16.2
N$93: AVR1.A R6.1
N$94: AVR2.A R27.1
N$95: C57.2 R13.2
N$96: C70.2 R16.2
OUT_L: C36.2 PHONE_OUT.4 R25.2
OUT_R [Analog]: C39.2 PHONE_OUT.1
PA_EN: L12.2 R10.2 U2.5
PHONE_L: PHONE_L.1 U3.25
PHONE_R: PHONE_R.1 U3.27
PHONE_SENSE: PHONE_SENSE.2 U7.140
RED_BOT: RED_BOT.2 U7.139
RED_TOP: RED_TOP.2 U7.132
REF: C50.1 U3.18
RESET_CC8531: RESET_CC8531.2 U7.20
RESET_CODEC: RESET_CODEC.2 U7.16
RF_N: U1.25 U2.2
RF_P: U1.24 U2.4
RX: U7.27
S_BCLK: U7.90
S_WCLK: U7.88
SCLK: SCLK2.2 SCLK3.2 SCLK4.1 SCLK.2 U7.110
TCK: JTAG.4 R14.1 U7.28
TDI: JTAG.8 R45.1 U7.29
TDO: JTAG.6 U7.30
TMS: JTAG.2 R11.1 U7.31
TX: U7.2
USB_SENSE: U7.19 USB_SENSE.2
USBOTGID: U7.129 USB2.4
VBUS [Power]: C51.1 R18.2 U6.11 U6.13 U7.39 USB1.1 USB2.1
VDDCORE: C43.1 C44.1 U7.10 U7.34 U7.45 U7.56 U7.61 U7.104 U7.124
WCLK: U3.3 WCLK2.1 WCLK.2
X_!PAIR: !PAIR.1 U1.7
X_BCLK: BCLK.1 L6.1
X_CS_CC8531: CC_DEBUG.5 CS_CC8531.1 U1.3
X_DIN: DIN.1 L13.1
X_DOUT: DOUT.1 L11.1
X_MCLK: L5.1 MCLK.1
X_MISO: CC_DEBUG.10 MISO.1 U1.6
X_MOSI: CC_DEBUG.8 MOSI.1 U1.5
X_RESET_CC8531: CC_DEBUG.7 L4.2 RESET_CC8531.1
X_SCLK: CC_DEBUG.6 SCLK.1 U1.4
X_USB_SENSE: R7.1 U1.19 USB_SENSE.1
X_WCLK: L9.1 WCLK.1

## Tracks (layer width: path | path; a pad name or v marks a point on that pad's centre or on a via)
3.3V  (11 unrouted)
!AVR_LED
  Top 0.2: U7.72 40.85,16.65 AVR.C
!AVR_LED2
  Top 0.2: U7.68 38.85,17.35 AVR1.C
!AVR_LED3
  Top 0.2: U7.71 40.35,15.85 AVR2.C
!CHANGE  (1 unrouted)
!PAIR  (1 unrouted)
!RESET  (via drill 0.4)
  Top 0.2: JTAG.10 8.54,26.46 R46.1 | U7.47 28.35,21.15 29,20.5 29.5,20.5 30,20 30,13.88 30.88,13 | 30.88,13 v31,12.5 33.5,12.5 34,12 C69.2 | 30.88,13 RESET.1
  Bottom 0.2: R46.1 9,18.5 15,12.5 v31,12.5
  other vias: 9,26
!SD_CARD  (via drill 0.4)
  Top 0.2: U7.66 37.85,21.85 v37,21 | v62,17 !SD_CARD.1
  Bottom 0.2: v37,21 60.5,21 62,19.5 v62,17
AGND  (13 unrouted)
  Top 0.2: U9.2 92.14,23.64 C33.2
AUDIO  (via drill 0.4)
  Top 0.2: AUDIO.2 60.5,27 60,27.5 v52.5,27.5 | U7.85 45.45,30.95 45.5,31 v48.5,31
  Bottom 0.2: v52.5,27.5 52,27.5 v48.5,31
AUX_!CHANGE  (via drill 0.4)
  Top 0.2: U8.28 90.6,86.1 v92,87.5 | v93,64.5 !CHANGE.1
  Bottom 0.2: v92,87.5 92,65.5 v93,64.5
AUX_BLUE_BOT
  Top 0.5: Q7.1 101.55,65.9 BLUE_BOT.1
AUX_BLUE_TOP
  Top 0.5: Q4.1 112.05,64 BLUE_TOP.1
AUX_CS  (via drill 0.4)
  Top 0.2: U8.14 89.8,92.2 v91,91 | v90.5,64.5 CS_TOUCH.1
  Bottom 0.2: v91,91 91,65 v90.5,64.5
AUX_GREEN_BOT
  Top 0.5: Q6.1 105.05,64.9 GREEN_BOT.1
AUX_GREEN_TOP
  Top 0.5: Q3.1 115.55,65 GREEN_TOP.1
AUX_MISO  (via drill 0.4)
  Top 0.2: U8.16 88.2,89.8 v89,89 | v85.5,64.5 MISO3.1
  Bottom 0.2: v89,89 89,68 v85.5,64.5
AUX_MOSI  (via drill 0.4)
  Top 0.2: U8.15 89,91 v90,90 | v88,64.5 MOSI3.1
  Bottom 0.2: v90,90 90,66.5 v88,64.5
AUX_RED_BOT
  Top 0.5: Q5.1 108.55,63.9 RED_BOT.1
AUX_RED_TOP
  Top 0.5: Q2.1 119.05,66 RED_TOP.1
AUX_SCLK  (via drill 0.4)
  Top 0.2: U8.17 86.7,92.3 v86,93 | v83,64.5 SCLK3.1
  Bottom 0.2: v86,93 86,67.5 v83,64.5
AUX_VDD  (via drill 0.4)  (5 unrouted)
  Top 0.2: U8.4 96.1,89.1 | 96.1,89.1 C64.1 | C63.1 97,88.2 96.1,89.1
  Top 0.5: LED_LL.2-2 v106,91.5 106,91 106.5,90.5 LED_LL.2 | v116,80 116.15,80.35 LED_UR.2-2 117.15,79 LED_UR.2 | v106,80.5 106.15,80.35 LED_LR.2-2 107.15,79 LED_LR.2 | 116.25,91.5 116.38,91.38 | 116.38,91.38 LED_UL.2 | 116.38,91.38 116.15,91.38 LED_UL.2-2 v116,91.5
  Bottom 0.5: v116,80 v116,91.5 v106,91.5 v106,80.5
AUX_VSS  (9 unrouted)
AVDD  (26 unrouted)
AVDD_CODEC  (6 unrouted)
  Top 0.2: U9.6 101.64,22.36 C34.1 | C41.1 101,35.5 | 101,35.5 C40.1 100,36.5 99.75,36.75 U3.26 | C42.1 101,35.5
AVR_VDD  (22 unrouted)
  Top 0.2: U7.75 45.45,25.95 C47.1 | C46.1 34,21.5 33.5,21.5 33.35,21.65 U7.57
BAT  (2 unrouted)
BCLK  (via drill 0.4)
  Top 0.2: U3.2 97.75,42.3 BCLK.2 v102.5,47 | BCLK2.1 64,38 v74,48
  Bottom 0.2: v74,48 74.5,48.5 102,48.5 102.5,48 v102.5,47
BLUE_BOT
  Top 0.2: BLUE_BOT.2 104,61 103.5,60.5 30,60.5 27.85,58.35 U7.135
BLUE_TOP
  Top 0.2: BLUE_TOP.2 111.5,61 109.5,59 32.5,59 28.35,54.85 U7.134
C_AUDIO  (via drill 0.4)
  Top 0.2: C36.1 102,17.5 103.5,19 103.5,23 R12.1 102.86,23.64 U9.7 99.98,23.5 v98,23.5 | AUDIO.1 v77.5,27
  Bottom 0.2: v77.5,27 94.5,27 v98,23.5
C_CS_CODEC
  Top 0.2: U3.9 93.25,39.75 92.5,40.5 92.5,45 91.5,46 90.5,46 90,46.5 CS_CODEC.1
C_LINEIN_SENSE  (via drill 0.4)
  Top 0.2: R22.1 85.9,4.9 LINE_IN.3 83.65,5 v82,5 | LINEIN_SENSE.1 81,22 v82,21
  Bottom 0.2: v82,21 v82,5
C_MISO
  Top 0.2: U3.11 91.75,38.75 90.5,40 90.5,44 89.5,45 85.5,45 85,45.5 MISO2.1
C_MOSI
  Top 0.2: U3.10 92.25,39.25 91.5,40 91.5,44.5 90.5,45.5 88,45.5 87.5,46 MOSI2.1
C_PHONE_SENSE  (via drill 0.4)
  Top 0.2: R24.1 106.9,4.9 PHONE_OUT.3 104.65,5 v102.5,5 | PHONE_SENSE.1 v77.5,24.5
  Bottom 0.2: v77.5,24.5 83,24.5 v102.5,5
C_RESET_CODEC
  Top 0.2: RESET_CODEC.1 99.7,39.25 U3.31
C_SCLK
  Top 0.2: U3.8 94.03,40.48 93.5,41 93.5,46.05 SCLK2.1
CS_CC8531  (1 unrouted)
CS_CODEC  (1 unrouted)
CS_SD  (via drill 0.4)
  Top 0.2: U7.67 38.35,20.35 v37.5,19.5 | v59.5,17 CS_SD.1
  Bottom 0.2: v37.5,19.5 58.5,19.5 59.5,18.5 v59.5,17
CS_TOUCH  (1 unrouted)
D+_CC8531  (1 unrouted)
  Top 0.2: USB1.3 122.5,7 R2.2
D+_UC  (via drill 0.4)
  Top 0.2: U7.37 23.35,18.65 R42.2 v23.5,8.5 | USB2.3 24.5,6 v25,6.5
  Bottom 0.2: v25,6.5 25,7 v23.5,8.5
D-_CC8531
  Top 0.2: USB1.2 121.85,6.65 R1.2
D-_UC
  Top 0.2: U7.38 23.85,21.15 R41.2 24.5,8 23.85,7.35 USB2.2
DIN  (via drill 0.4)
  Top 0.2: 97.45,46.5 96.75,45.8 U3.4 | DOUT2.1 65,30.5 v81,46.5 | v97.5,46.5 97.45,46.5 | 97.45,46.5 DIN.2
  Bottom 0.2: v81,46.5 v97.5,46.5
DOUT  (via drill 0.4)
  Top 0.2: DOUT.2 95,46.5 v95.5,46 96.25,45.25 U3.5 | DIN2.1 64.5,33 v77,45.5
  Bottom 0.2: v77,45.5 95,45.5 v95.5,46
DVDD
  Top 0.2: U3.29 100.75,38.25 C49.1
DVDD_CODEC  (4 unrouted)
  Top 0.2: U3.6 95.75,41.75 C45.1
ERASE
  Top 0.2: U7.130 30.35,48.15 30,48.5 30,53 30.5,53.5 30.95,53.5 ERASE.1
GND  (109 unrouted)
  Top 0.2: U3.28 96.75,37.75 U3.GND 95.25,39.25 U3.7
GREEN_BOT  (via drill 0.4)
  Top 0.2: GREEN_BOT.2 106.5,61.5 105,60 31,60 v29.5,58.5 | v27,58.5 27,58 27.35,57.65 U7.136
  Bottom 0.2: v29.5,58.5 v27,58.5
GREEN_TOP
  Top 0.2: GREEN_TOP.2 114,59.5 113,58.5 33,58.5 28.85,54.35 U7.133
IN_L
  Top 0.2: LINE_IN.4 83.75,13.75 C38.1 83,13.5 R23.2
IN_R
  Top 0.2: LINE_IN.1 C37.1
IOVDD  (12 unrouted)
IOVDD1
  Top 0.2: R1.1 C14.1 121.75,11.75 U1.1
IOVDD2
  Top 0.2: R2.1 C13.1 122.25,11.75 U1.2
LINE_L  (via drill 0.4)
  Top 0.2: U3.22 97.25,34.25 v96.5,33.5 | v99,30.5 LINE_L.1
  Bottom 0.2: v96.5,33.5 96.5,33 v99,30.5
LINE_R
  Top 0.2: U3.23 97.75,31.75 96,30 LINE_R.1
LINEIN_SENSE  (via drill 0.4)
  Top 0.2: LINEIN_SENSE.2 66.5,22 62.5,26 v52,26 | v46,38 45.05,38.95 U7.101
  Bottom 0.2: v52,26 50,26 47,29 47,37 v46,38
LNA_EN  (1 unrouted)
M_BCLK  (via drill 0.4)
  Top 0.2: U7.7 22.95,39.45 v24.5,41 | v50,38 BCLK2.2
  Bottom 0.2: v24.5,41 47,41 v50,38
M_DIN/S_DOUT
  Top 0.2: U7.89 54,32.95 DIN2.2
M_DOUT/S_DIN
  Top 0.2: U7.78 51,27.45 DOUT2.2
M_WCLK  (via drill 0.4)
  Top 0.2: U7.8 24.45,38.95 v25.5,40 | v50,35.5 WCLK2.2
  Bottom 0.2: v25.5,40 45.5,40 v50,35.5
MCLK
  Top 0.2: U3.1 98.42,40.48 MCLK.2
MISO  (via drill 0.4)  (1 unrouted)
  Top 0.2: MISO4.1 49.5,20.5 v53.5,24.5 | v50.5,42.5 42.8,42.5 U7.108 | MISO2.2 85,48.5 v84,49.5 58,49.5 v57,48.5 | MISO3.2 v85.5,61.5
  Bottom 0.2: v53.5,24.5 53.5,39.5 v50.5,42.5 49,44 49,47.5 50,48.5 v57,48.5 | v85.5,61.5 85.5,51 v84,49.5
MOSI  (via drill 0.4)  (1 unrouted)
  Top 0.2: MOSI4.1 v57,23.5 | U7.109 41,44.5 v54.5,44.5 54.5,48 57,50.5 87,50.5 | MOSI2.2 87.5,50 87,50.5 | MOSI3.2 v88,61.5 | v88,50.5 87,50.5
  Bottom 0.2: v57,23.5 57,42 v54.5,44.5 | v88,61.5 v88,50.5
N$1
  Top 0.2: U1.21 126.25,25.25 127,26 132,26 132.65,25.35 X1.1 132.5,23.45 C29.1
N$2
  Top 0.2: U1.22 125.75,26.25 126.9,27.4 X1.3 130.5,27.55 C24.1
N$3
  Top 0.2: U1.11 129.25,18.75 131.5,16.5 L4.1
N$4
  Top 0.2: U1.16 131.75,21.25 L11.2
N$5
  Top 0.2: U1.14 129.75,20.25 131.5,18.5 L6.2
N$6
  Top 0.2: U7.35 15.95,25.45 15.5,25 15.5,23 16.2,22.3 X3.X1 16.5,22.5 C56.1
N$7  (1 unrouted)
N$8  (1 unrouted)
N$9  (1 unrouted)
N$10
  Top 0.2: U8.31 93,84.5 C55.2 94,82.5 R26.1
N$11
  Top 0.2: U8.30 92.2,83.3 C55.1
N$12
  Top 0.2: AVR.A R44.1
N$13  (1 unrouted)
N$14  (2 unrouted)
N$15  (1 unrouted)
N$16  (3 unrouted)
N$17
  Top 0.2: U3.24 98.25,34.25 C48.1
N$18  (1 unrouted)
N$19  (1 unrouted)
N$20  (1 unrouted)
N$21  (1 unrouted)
N$22  (1 unrouted)
N$23
  Top 0.2: U1.13 129.25,19.75 131.5,17.5 L5.2
N$24  (1 unrouted)
N$25
  Top 0.2: U1.15 130.25,20.75 131.5,19.5 L9.2
N$26
  Top 0.2: U9.1 92.59,24.91 C33.1
N$27
  Top 0.2: U1.17 135.75,21.75 L13.2
N$28  (1 unrouted)
N$29  (1 unrouted)
N$30
  Top 0.2: U8.9 96.5,93.5 C58.2 98,94 R33.1
N$31  (1 unrouted)
N$32  (1 unrouted)
N$33  (1 unrouted)
N$34
  Top 0.2: C37.2 84.5,15 85.5,16 85.5,31 91.75,37.25 U3.14
N$35
  Top 0.2: C38.2 83.5,30.5 90.75,37.75 U3.13
N$36  (1 unrouted)
N$37  (2 unrouted)
N$38  (2 unrouted)
N$39
  Top 0.2: AVDD_CODEC.1 L14.2
N$40
  Top 0.2: U9.5 98.52,19.5 R15.1 95.5,18 C39.1
N$41
  Top 0.2: U8.11 92.2,95.7 C59.2 92.5,97 R34.1
N$42
  Top 0.2: U8.13 90.6,94.4 C60.2 89.5,96.5 R35.1
N$43
  Top 0.2: C57.1 102.05,27 PHONE_L.2 LINE_L.2
N$44
  Top 0.2: R26.2 82,79.5 76,85.5 19,85.5 SW1.P$1
N$45
  Top 0.2: C70.1 89,24.5 92,27.5 93.45,27.5 PHONE_R.2 LINE_R.2
N$46
  Top 0.2: DVDD_CODEC.1 L15.2
N$47  (1 unrouted)
N$48  (1 unrouted)
N$49  (5 unrouted)
N$50
  Top 0.2: CC_DEBUG.9 135.86,4.73 EXT.2
N$51  (1 unrouted)
N$52  (1 unrouted)
N$53
  Top 0.2: U9.8 102.41,24.91 R12.2 R13.1
N$54
  Top 0.2: U9.4 94.88,19.62 R15.2 R16.1
N$55
  Top 0.2: U9.3 92.86,22.36 R31.1
N$56
  Top 0.5: 123.5,80 123.5,70 122.1,68.6 Q2.3 | 123.5,80 LED_UR.1-2 118.85,79 LED_UR.1 | 123.5,80 123.5,90.5 122.5,91.5 LED_UL.1-2 118.85,90.5 LED_UL.1
N$57
  Top 0.2: MICROSD1.CD/DAT3 57.51,8.51 59.5,10.5 CS_SD.2
N$58  (via drill 0.4)
  Top 0.5: v120,86.5 120,86.35 LED_UL.4-2 118.85,87.5 LED_UL.4 | LED_UR.4 119,76 v120,75 119.85,75.35 LED_UR.4-2 119.85,73.35 116.5,70 Q3.3
  Bottom 0.5: v120,75 v120,86.5
N$59
  Top 0.2: U7.36 19.85,24.95 X3.X2 20.5,24 21,23.5 C30.1
N$60
  Top 0.2: U8.8 97.3,92.3 C58.1
N$61
  Top 0.2: R33.2 101,72 95,66 40.5,66 SW4.P$1
N$62
  Top 0.2: U8.10 93,94.5 C59.1
N$63
  Top 0.2: R34.2 97,99.5 100,96.5 100,76 91.5,67.5 59,67.5 SW5.P$1
N$64
  Top 0.2: U8.12 91.4,95.6 C60.1
N$65
  Top 0.2: R35.2 72,99.5 SW6.P$1
N$66
  Top 0.2: R39.1 85.5,83.5 C66.2 87.5,85.5 U8.25
N$67
  Top 0.2: MICROSD1.CLK 54.2,11.79 53,13 52.5,13 52,13.5 SCLK4.2
N$68
  Top 0.2: U8.27 89.8,83.3 C67.2 89,82.5 R40.1
N$69
  Top 0.2: U8.24 87,86.5 85,84.5 C66.1
N$70
  Top 0.2: R39.2 83.5,81 77.5,87 24.5,87 SW9.P$1
N$71
  Top 0.2: U8.19 85.3,90.7 C61.2 84,91 R37.1
N$72
  Top 0.2: R37.2 60.5,91 SW7.P$1
N$73
  Top 0.2: U8.22 84.8,88.3 C62.2 83.5,88 R38.1
N$74
  Top 0.2: R38.2 79.5,87.5 78,89 42.5,89 SW8.P$1
N$75
  Top 0.2: U8.23 86,87.5 C62.1
N$76
  Top 0.2: U8.20 84.9,89.9 C61.1
N$77
  Top 0.2: U8.29 91.4,83.9 R36.1
N$78
  Top 0.5: LED_UR.3-2 113,71.85 Q4.3 | LED_UR.3-2 115.5,75 113.5,77 113.5,85 115,86.5 LED_UL.3-2 117.15,87.5 LED_UL.3 | LED_UR.3 117.15,76 LED_UR.3-2
N$79
  Top 0.5: 112.5,80 112.5,91 112,91.5 LED_LL.1-2 108.85,90.5 LED_LL.1 | 112.5,80 112.5,72.5 112,72 110.5,72 109.5,71 Q5.3 | 112.5,80 LED_LR.1-2 108.85,79 LED_LR.1
N$80  (via drill 0.4)
  Top 0.5: LED_LR.4-2 109.5,74.65 109.5,72.5 109,72 107,72 106,71 Q6.3 | LED_LR.4-2 v110,75 109,76 LED_LR.4 109.75,75 LED_LR.4-2 | LED_LL.4 108.85,87.5 LED_LL.4-2 110,86.35 v110,86.5
  Bottom 0.5: v110,75 v110,86.5
N$81
  Top 0.2: U8.26 89,84.5 C67.1
N$82  (1 unrouted)
N$83
  Top 0.5: 103.1,75 LED_LR.3-2 106.25,75 LED_LR.3 | 103.1,75 103.1,86.1 103.5,86.5 LED_LL.3-2 107.15,87.5 LED_LL.3 | Q7.3 102.5,74.4 103.1,75
N$84
  Top 0.2: MICROSD1.CMD 56.41,10.1 56,10.5 56,13.55 MOSI4.2
N$85
  Top 0.2: U7.43 26.35,20.65 R41.1
N$86
  Top 0.2: U7.42 25.85,21.85 25.5,21.5 R42.1
N$87  (via drill 0.4)
  Top 0.2: U7.40 24.85,24.35 v25.5,25 | R32.2 C68.1
  Bottom 0.2: v25.5,25 26.5,25 27,24.5 C68.1
  other vias: 27,19
N$88
  Top 0.2: MICROSD1.DAT0 52.01,7.5 49.5,10 MISO4.2
N$89
  Top 0.2: MICROSD1.SWA 61.4,6.9 62.5,8 62.5,14.05 !SD_CARD.2
N$90
  Top 0.2: U7.53 31.35,20.65 R43.2
N$91
  Top 0.2: MICROSD1.VDD 55.3,13.74 VDD_SD.1
N$92  (1 unrouted)
N$93
  Top 0.2: AVR1.A R6.1
N$94
  Top 0.2: AVR2.A R27.1
N$95
  Top 0.2: R13.2 105.5,23.5 106,24 106,26.5 C57.2
N$96
  Top 0.2: R16.2 89.5,19.5 C70.2
OUT_L
  Top 0.2: PHONE_OUT.4 104.75,10.85 C36.2 100.6,15 R25.2
OUT_R
  Top 0.2: PHONE_OUT.1 93,11.1 C39.2
PA_EN  (2 unrouted)
PHONE_L  (via drill 0.4)
  Top 0.2: U3.25 98.97,35.02 v99,35 | v101.5,30.5 PHONE_L.1
  Bottom 0.2: v99,35 99,33 v101.5,30.5
PHONE_R  (via drill 0.4)
  Top 0.2: PHONE_R.1 v93.5,29.5 | U3.27 99.75,37.25 v100,37.5
  Bottom 0.2: v93.5,29.5 102.5,29.5 103,30 103,36 101.5,37.5 v100,37.5
PHONE_SENSE  (via drill 0.4)
  Top 0.2: U7.140 25.35,42.15 26,41.5 27,41.5 v29.5,39 | v73.5,24.5 PHONE_SENSE.2
  Bottom 0.2: v29.5,39 46,22.5 71.5,22.5 v73.5,24.5
RED_BOT  (via drill 0.4)
  Top 0.2: RED_BOT.2 109,61.5 107,59.5 32,59.5 30,57.5 v29,57.5 | U7.139 25.85,56.85 v26,57
  Bottom 0.2: v29,57.5 26.5,57.5 v26,57
RED_TOP
  Top 0.2: RED_TOP.2 116.5,59.5 115,58 33.5,58 29.35,53.85 U7.132
REF  (1 unrouted)
RESET_CC8531  (1 unrouted)
RESET_CODEC  (1 unrouted)
RF_N  (1 unrouted)
RF_P  (1 unrouted)
SCLK  (via drill 0.4)  (1 unrouted)
  Top 0.2: SCLK4.1 52,21 v56,25 | U7.110 40.35,45.35 41,46 v51,46 51,48 54.5,51.5 v83,51.5 91.5,51.5 92.5,50.5 SCLK2.2 | SCLK3.2 v83,61.5
  Bottom 0.2: v56,25 56,41 v51,46 | v83,61.5 v83,51.5
TCK
  Top 0.2: JTAG.4 8.73,30.27 R14.1 10,31 18,31 20.05,28.95 U7.28
TDI  (via drill 0.4)
  Top 0.2: U7.29 19.05,28.45 17.5,30 v14,30 | JTAG.8 8.73,27.73 R45.1
  Bottom 0.2: v14,30 12,30 10,28 R45.1
  other vias: 9,28
TDO
  Top 0.2: U7.30 18.05,27.95 17,29 JTAG.6
TMS  (via drill 0.4)
  Top 0.2: U7.31 16.55,27.45 v16,28 | JTAG.2 8.54,31.54 R11.1
  Bottom 0.2: v16,28 16,31.5 15.5,32 R11.1
  other vias: 9,32
USB_SENSE  (1 unrouted)
USBOTGID  (1 unrouted)
VBUS  (6 unrouted)
VDDCORE
  Top 0.2: C43.1 34,20 33.5,20.5 C44.1 32.85,20.65 U7.56 32.85,24.5 | U7.61 35.35,24.15 35,24.5 32.85,24.5 | U7.45 27.35,24.5 | 27.35,24.5 32.85,24.5 | U7.34 27.35,25.95 | 27.35,25.95 27.35,24.5 | U7.10 27.35,37.95 | 27.35,37.95 27.35,25.95 | U7.124 33.35,40.5 | 33.35,40.5 33.35,37.95 27.35,37.95 | U7.104 42.75,40.5 33.35,40.5
WCLK  (via drill 0.4)
  Top 0.2: U3.3 97.25,44.25 v100,47 WCLK.2 | WCLK2.1 64,35.5 v76,47.5
  Bottom 0.2: v76,47.5 99.55,47.5 WCLK.2 v100,47
X_!PAIR  (1 unrouted)
X_BCLK  (1 unrouted)
X_CS_CC8531  (1 unrouted)
  Top 0.2: U1.3 122.75,14.25 124,13 125.5,13 126,12.5 126,8 127,7 131,7 131.5,6.5 131.5,4.75 CC_DEBUG.5
X_DIN  (1 unrouted)
X_DOUT  (1 unrouted)
X_MCLK  (1 unrouted)
X_MISO  (1 unrouted)
  Top 0.2: CC_DEBUG.10 134.06,13.44 132.5,15 125,15 124.25,15.75 U1.6
X_MOSI  (1 unrouted)
  Top 0.2: U1.5 123.75,15.25 124.5,14.5 130.5,14.5 132.79,12.21 CC_DEBUG.8
X_RESET_CC8531  (1 unrouted)
  Top 0.2: L4.2 135,16.5 136,15.5 136,8 135,7 133.5,7 132.79,6.29 CC_DEBUG.7
X_SCLK  (1 unrouted)
  Top 0.2: U1.4 123.25,14.75 124,14 130,14 131.5,12.5 131.5,8.75 CC_DEBUG.6
X_USB_SENSE  (2 unrouted)
X_WCLK  (1 unrouted)